# Altium PCB Ver1.0-2280_2023-12-28.pcbdoc
Units mm, origin at the board's own origin, x right, y up, seen from the top; angles counter-clockwise.
Board outline 58.17 x 115.32 mm, 2 copper layers (Top Layer, Bottom Layer); 30 components, 47 nets, 402 pads, 81 vias.
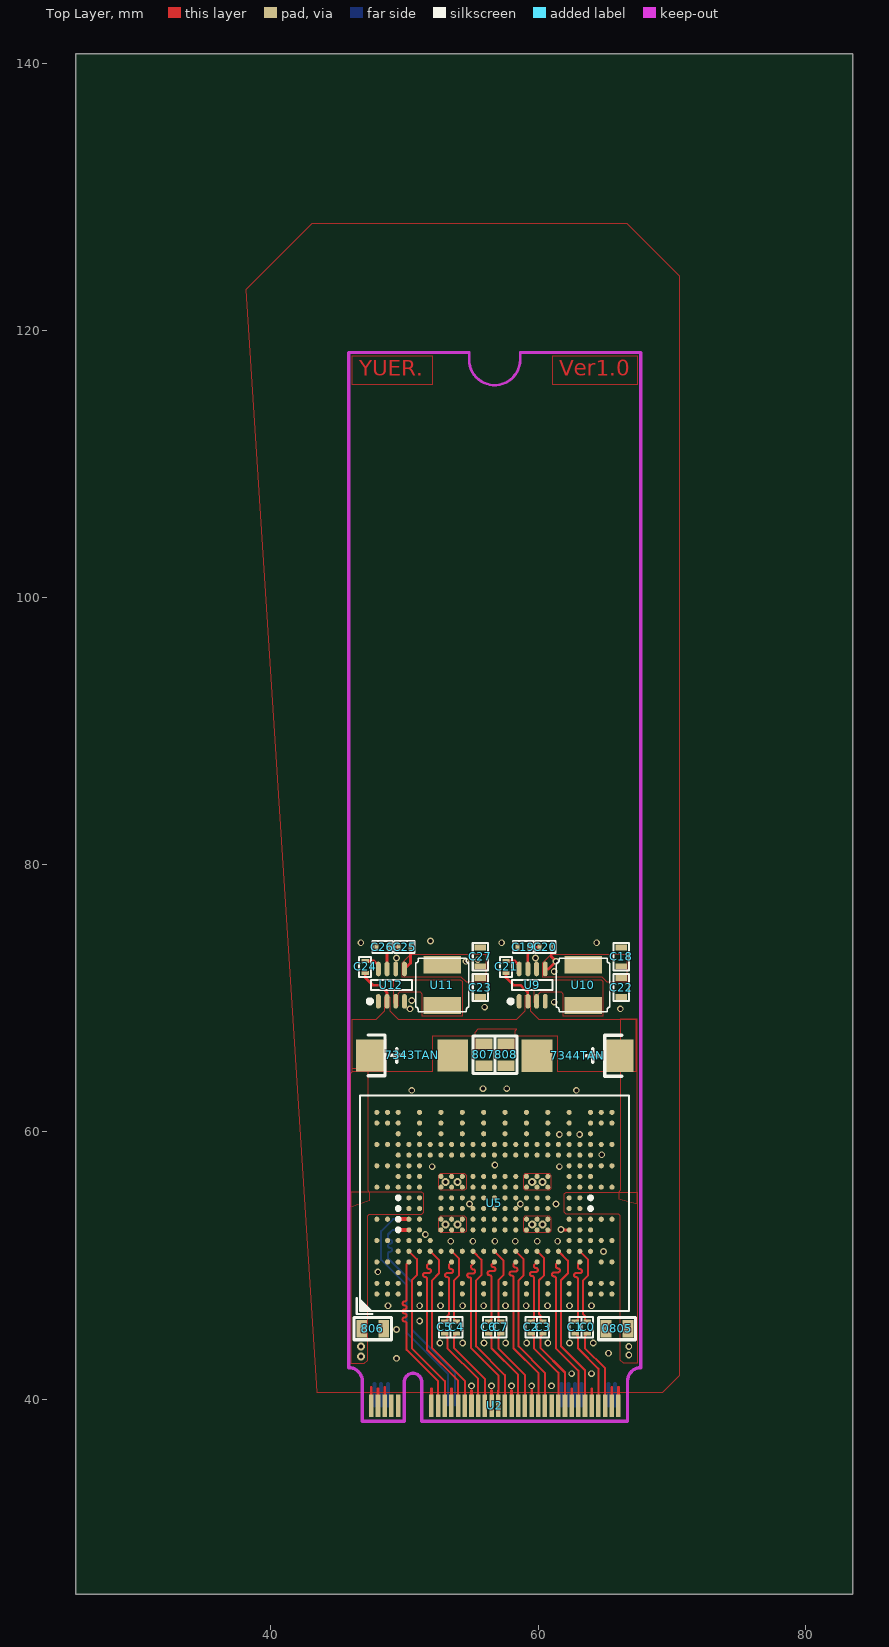
[diagram p0: Top Layer view]
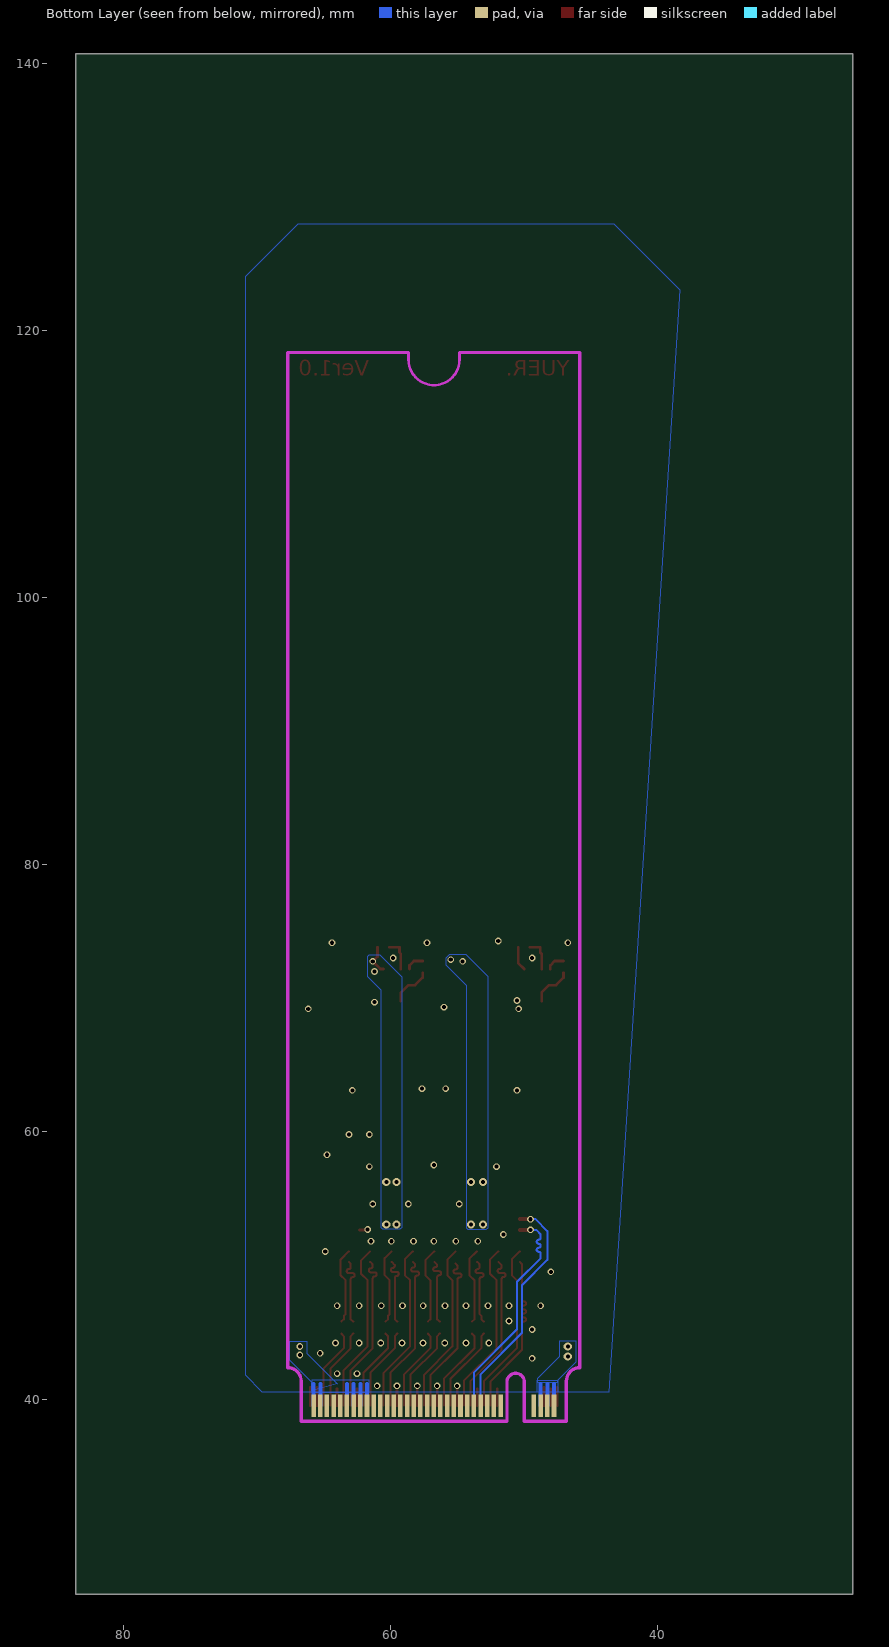
[diagram p1: Bottom Layer view, seen from below]

## Layer stack, top to bottom
Top Layer: signal copper (thickness not stored)
Dielectric: dielectric 0.32, FR-4, Dk 4.8
Bottom Layer: signal copper (thickness not stored)

## Board outline
83.566,25.4 25.4,25.4 25.4,140.716 83.566,140.716

## Components (designator, comment, footprint, x,y, rotation, side; value= is the part's Value field where it differs from the comment)
0805 "_" ?#1 67.183,46.482 r0 top
806 "_" ?#1 48.895,46.482 r0 top
807 "_" ?#1 54.737,67.056 r90 top
808 "_" ?#1 56.388,67.056 r90 top
7343TAN "_" ?#2 48.768,64.516 r180 top
7344TAN "_" ?#2 64.77,66.929 r0 top
C0 "0402" ?#3 64.897,44.831 r270 top
C1 "0402" ?#3 64.008,44.831 r270 top
C2 "0402" ?#3 60.706,44.831 r270 top
C3 "0402" ?#3 61.595,44.831 r270 top
C4 "0402" ?#3 55.118,44.831 r270 top
C5 "0402" ?#3 54.229,44.831 r270 top
C6 "0402" ?#3 57.531,44.831 r270 top
C7 "0402" ?#3 58.42,44.831 r270 top
C18 "0603" ?#4 67.437,71.628 r270 top
C19 "0402" ?#3 59.436,75.057 r0 top
C20 "0402" ?#3 61.087,75.057 r0 top
C21 "0402" ?#3 56.388,72.898 r90 top
C22 "0603" ?#4 67.437,69.342 r270 top
C23 "0603" ?#4 56.896,69.342 r270 top
C24 "0402" ?#3 45.847,72.898 r90 top
C25 "0402" ?#3 50.546,75.057 r0 top
C26 "0402" ?#3 48.895,75.057 r0 top
C27 "0603" ?#4 56.896,71.628 r270 top
U2 "M.2 M KEY FINGERS" "M.2 M KEY FINGERS" 56.769,38.354 r270 top
U5 "1620 BGA291SSD" "1620 BGA291SSD" 56.642,54.61 r0 top
U9 "MP2143" TSOT-23-8_L2.9-W1.6-P0.65-LS2.8-BR 59.563,70.993 r270 top
U10 "NR4018" NR4018 63.373,70.993 r0 top
U11 "NR4018" NR4018 52.832,70.993 r0 top
U12 "MP2143" TSOT-23-8_L2.9-W1.6-P0.65-LS2.8-BR 49.022,70.993 r270 top

## Footprints (in the part's own frame and the unit in brackets; to place one, negate y for a bottom-side part, rotate by r counter-clockwise, add the part's x,y. Pads: shape width x height; smd on the part's side, far side on the other; paste and mask are expansions set on the pad)
"1620 BGA291SSD" [mil]
  round 15.06 smd paste-3937 mask+2: A1(-342.92,-265.44) A2(-342.92,-233.94) A4(-342.92,-170.95) A6(-342.92,-107.96) A8(-342.92,-44.97) A11(-342.92,49.52) A13(-342.92,112.51) A15(-342.92,175.51) A17(-342.92,238.5) A18(-342.92,269.99) AA1(287,-265.44) AA2(287,-233.94) AA5(287,-139.45) AA6(287,-107.96) AA7(287,-76.46) AA8(287,-44.97) AA11(287,49.52) AA12(287,81.02) AA13(287,112.51) AA14(287,144.01) AA15(287,175.51) AA16(287,207) AA17(287,238.5) AA18(287,269.99) AB1(318.5,-265.44) AB2(318.5,-233.94) AB4(318.5,-170.95) AB6(318.5,-107.96) AB8(318.5,-44.97) AB11(318.5,49.52) AB13(318.5,112.51) AB15(318.5,175.51) AB17(318.5,238.5) AB18(318.5,269.99) AC1(350,-265.44) AC2(350,-233.94) AC4(350,-170.95) AC6(350,-107.96) AC8(350,-44.97) AC11(350,49.52) AC13(350,112.51) AC15(350,175.51) AC17(350,238.5) AC18(350,269.99) B1(-311.42,-265.44) B2(-311.42,-233.94) B4(-311.42,-170.95) B6(-311.42,-107.96) B8(-311.42,-44.97) B11(-311.42,49.52) B13(-311.42,112.51) B15(-311.42,175.51) B17(-311.42,238.5) B18(-311.42,269.99) C1(-279.92,-265.44) C2(-279.92,-233.94) C3(-279.92,-202.44) C4(-279.92,-170.95) C5(-279.92,-139.45) C6(-279.92,-107.96) C11(-279.92,49.52) C12(-279.92,81.02) C13(-279.92,112.51) C14(-279.92,144.01) C15(-279.92,175.51) C16(-279.92,207) C17(-279.92,238.5) C18(-279.92,269.99) D4(-248.43,-170.95) D5(-248.43,-139.45) D6(-248.43,-107.96) D7(-248.43,-76.46) D8(-248.43,-44.97) D9(-248.43,-13.47) D10(-248.43,18.03) D11(-248.43,49.52) D12(-248.43,81.02) D13(-248.43,112.51) D14(-248.43,144.01) D15(-248.43,175.51) E1(-216.93,-265.44) E2(-216.93,-233.94) E5(-216.93,-139.45) E6(-216.93,-107.96) E7(-216.93,-76.46) E8(-216.93,-44.97) E9(-216.93,-13.47) E10(-216.93,18.03) E11(-216.93,49.52) E12(-216.93,81.02) E13(-216.93,112.51) E14(-216.93,144.01) E15(-216.93,175.51) E16(-216.93,207) E17(-216.93,238.5) E18(-216.93,269.99) F4(-185.44,-170.95) F5(-185.44,-139.45) F6(-185.44,-107.96) F14(-185.44,144.01) F15(-185.44,175.51) G1(-153.94,-265.44) G2(-153.94,-233.94) G5(-153.94,-139.45) G7(-153.94,-76.46) G8(-153.94,-44.97) G9(-153.94,-13.47) G10(-153.94,18.03) G11(-153.94,49.52) G12(-153.94,81.02) G14(-153.94,144.01) G15(-153.94,175.51) G16(-153.94,207) G17(-153.94,238.5) G18(-153.94,269.99) H4(-122.44,-170.95) H5(-122.44,-139.45) H7(-122.44,-76.46) H8(-122.44,-44.97) H9(-122.44,-13.47) H10(-122.44,18.03) H11(-122.44,49.52) H12(-122.44,81.02) H14(-122.44,144.01) H15(-122.44,175.51) J1(-90.95,-265.44) J2(-90.95,-233.94) J5(-90.95,-139.45) J7(-90.95,-76.46) J8(-90.95,-44.97) J9(-90.95,-13.47) J10(-90.95,18.03) J11(-90.95,49.52) J12(-90.95,81.02) J14(-90.95,144.01) J15(-90.95,175.51) J16(-90.95,207) J17(-90.95,238.5) J18(-90.95,269.99) K4(-59.45,-170.95) K5(-59.45,-139.45) K7(-59.45,-76.46) K8(-59.45,-44.97) K9(-59.45,-13.47) K10(-59.45,18.03) K11(-59.45,49.52) K12(-59.45,81.02) K14(-59.45,144.01) K15(-59.45,175.51) L1(-27.96,-265.44) L2(-27.96,-233.94) L5(-27.96,-139.45) L7(-27.96,-76.46) L8(-27.96,-44.97) L9(-27.96,-13.47) L10(-27.96,18.03) L11(-27.96,49.52) L12(-27.96,81.02) L14(-27.96,144.01) L15(-27.96,175.51) L16(-27.96,207) L17(-27.96,238.5) L18(-27.96,269.99) M4(3.54,-170.95) M5(3.54,-139.45) M7(3.54,-76.46) M8(3.54,-44.97) M9(3.54,-13.47) M10(3.54,18.03) M11(3.54,49.52) M12(3.54,81.02) M14(3.54,144.01) M15(3.54,175.51) N1(35.04,-265.44) N2(35.04,-233.94) N5(35.04,-139.45) N7(35.04,-76.46) N8(35.04,-44.97) N9(35.04,-13.47) N10(35.04,18.03) N11(35.04,49.52) N12(35.04,81.02) N14(35.04,144.01) N15(35.04,175.51) N16(35.04,207) N17(35.04,238.5) N18(35.04,269.99) P4(66.53,-170.95) P5(66.53,-139.45) P7(66.53,-76.46) P8(66.53,-44.97) P9(66.53,-13.47) P10(66.53,18.03) P11(66.53,49.52) P12(66.53,81.02) P14(66.53,144.01) P15(66.53,175.51) R1(98.03,-265.44) R2(98.03,-233.94) R5(98.03,-139.45) R7(98.03,-76.46) R8(98.03,-44.97) R9(98.03,-13.47) R10(98.03,18.03) R11(98.03,49.52) R12(98.03,81.02) R14(98.03,144.01) R15(98.03,175.51) R16(98.03,207) R17(98.03,238.5) R18(98.03,269.99) T4(129.52,-170.95) T5(129.52,-139.45) T7(129.52,-76.46) T8(129.52,-44.97) T9(129.52,-13.47) T10(129.52,18.03) T11(129.52,49.52) T12(129.52,81.02) T14(129.52,144.01) T15(129.52,175.51) U1(161.02,-265.44) U2(161.02,-233.94) U5(161.02,-139.45) U7(161.02,-76.46) U8(161.02,-44.97) U9(161.02,-13.47) U10(161.02,18.03) U11(161.02,49.52) U12(161.02,81.02) U14(161.02,144.01) U15(161.02,175.51) U16(161.02,207) U17(161.02,238.5) U18(161.02,269.99) V4(192.52,-170.95) V5(192.52,-139.45) V14(192.52,144.01) V15(192.52,175.51) W1(224.01,-265.44) W2(224.01,-233.94) W5(224.01,-139.45) W6(224.01,-107.96) W7(224.01,-76.46) W8(224.01,-44.97) W9(224.01,-13.47) W10(224.01,18.03) W11(224.01,49.52) W12(224.01,81.02) W13(224.01,112.51) W14(224.01,144.01) W15(224.01,175.51) W16(224.01,207) W17(224.01,238.5) W18(224.01,269.99) Y4(255.51,-170.95) Y5(255.51,-139.45) Y6(255.51,-107.96) Y7(255.51,-76.46) Y8(255.51,-44.97) Y9(255.51,-13.47) Y10(255.51,18.03) Y11(255.51,49.52) Y12(255.51,81.02) Y13(255.51,112.51) Y14(255.51,144.01) Y15(255.51,175.51)
  silkscreen extent -402,-337 400,320
"M.2 M KEY FINGERS" [mm]
  rect 1.7x0.34 smd paste+0 mask+0.102: 1(-1.15,9.25) 3(-1.15,8.75) 5(-1.15,8.249) 7(-1.15,7.749) 9(-1.15,7.249) 11(-1.15,6.749) 13(-1.15,6.249) 15(-1.15,5.749) 17(-1.15,5.249) 19(-1.15,4.749) 21(-1.15,4.249) 23(-1.15,3.749) 25(-1.15,3.249) 27(-1.15,2.749) 29(-1.15,2.249) 31(-1.15,1.749) 33(-1.15,1.249) 35(-1.15,0.749) 37(-1.15,0.249) 39(-1.15,-0.251) 41(-1.15,-0.751) 43(-1.15,-1.251) 45(-1.15,-1.751) 47(-1.15,-2.251) 49(-1.15,-2.751) 51(-1.15,-3.251) 53(-1.15,-3.751) 55(-1.15,-4.251) 57(-1.15,-4.751) 67(-1.15,-7.251) 69(-1.15,-7.751) 71(-1.15,-8.251) 73(-1.15,-8.751) 75(-1.15,-9.251)
  rect 1.7x0.34 smd far side paste+0 mask+0.102: 2(-1.15,9) 4(-1.15,8.501) 6(-1.15,8.001) 8(-1.15,7.501) 10(-1.15,7.001) 12(-1.15,6.501) 14(-1.15,6.001) 16(-1.15,5.501) 18(-1.15,5.001) 20(-1.151,4.499) 22(-1.15,4.001) 24(-1.15,3.501) 26(-1.15,3.001) 28(-1.15,2.501) 30(-1.15,2.001) 32(-1.15,1.501) 34(-1.15,1.001) 36(-1.15,0.501) 38(-1.15,0.001) 40(-1.15,-0.499) 42(-1.151,-0.998) 44(-1.15,-1.499) 46(-1.15,-1.999) 48(-1.15,-2.499) 50(-1.15,-2.999) 52(-1.15,-3.499) 54(-1.15,-3.999) 56(-1.15,-4.499) 58(-1.15,-4.999) 68(-1.15,-7.499) 70(-1.15,-7.999) 72(-1.15,-8.499) 74(-1.15,-8.999)
  Keep-Out Layer lines w0.254: -3,-9.93 0,-9.93 0,-6.78 -2.9,-6.78 ; -2.9,-5.48 0,-5.48 0,9.93 -3,9.93
  Keep-Out Layer lines w0.254: -4,-10.93 cw(c-3,-10.93) -3,-9.93 ; -2.9,-6.78 cw(c-2.931,-6.13) -2.9,-5.48 ; -3,9.93 cw(c-3,10.93) -4,10.93
NR4018 [mm]
  rect 2.8x1.3 smd paste+0 mask+0.102: 1(0,1.527) 2(0,-1.527)
  silkscreen extent -2,-2 2,2
TSOT-23-8_L2.9-W1.6-P0.65-LS2.8-BR [mm]
  oval 1.1x0.364 smd paste+0 mask+0.051: 1(1.211,-0.975) 2(1.211,-0.325) 3(1.211,0.325) 4(1.211,0.975) 5(-1.211,0.975) 6(-1.211,0.325) 7(-1.211,-0.325) 8(-1.211,-0.975)
  silkscreen extent -0.37,-1.76 1.36,1.53
?#1 [mm]
  rect 0.8x1.3 smd paste+0 mask+0.05: 1(-0.445,-1.217) 2(-2.095,-1.217)
  silkscreen extent -2.67,-2.04 0.13,-0.39
?#2 [mm]
  rect 2.3x2.4 smd paste+0 mask+0.051: 1(-4.851,-1.221) 1(1.245,-1.221)
  silkscreen extent -1.17,-2.74 1.5,0.3
?#3 [mm]
  rect 0.3x0.55 smd paste+0 mask+0.051: 1(-0.985,-1.217) 1(-0.096,-1.217)
  silkscreen extent -1.31,-1.66 0.22,-0.77
?#4 [mm]
  rect 0.45x0.85 smd paste+0 mask+0.051: 2(-2.173,-1.216) 2(-0.776,-1.216)
  silkscreen extent -2.5,-1.78 -0.47,-0.64

## Via types
v1: diameter 0.5, hole 0.305, Top Layer to Bottom Layer, tented both sides, 71 vias
v2: diameter 0.61, hole 0.305, Top Layer to Bottom Layer, tented both sides, 10 vias

## Nets (pads, with @x,y where several pads share a name; then routed paths per layer and width w, separated by ;. In a path a pad name is that pad's centre, name@x,y a point inside that pad or via, vN(x,y) a via of type N, cw(c..) or ccw(c..) an arc to the next point about the centre after c; other vN are vias at no path point)
1.2V: C23.2@55.68,71.515 C25.1@50.45,73.84 C27.2@55.68,72.404 U5.G7 U5.G8 U5.G11 U5.G12 U5.H7 U5.H8 U5.H11 U5.H12 U5.J7 U5.J8 U5.J11 U5.J12 U11.1 U12.5 | length 1.8
  Top Layer w0.2: U12.5 50.449,72.644 C25.1@50.449,73.84
  other v1: 54.61,72.771 55.499,72.898
  other v2: 53.086,53.086 53.975,53.086 53.086,56.261 53.975,56.261
1.8V: C18.2@66.221,72.404 C20.1@60.991,73.84 C22.2@66.221,71.515 U5.R7 U5.R8 U5.R11 U5.R12 U5.T7 U5.T8 U5.T11 U5.T12 U5.U7 U5.U8 U5.U11 U5.U12 U9.5 U10.1 | length 2.3
  Top Layer w0.2: U9.5 60.775,72.205 v1(61.341,72.771) 60.991,73.121 C20.1@60.991,73.84
  other v1: 61.214,72.009
  other v2: 59.563,53.086 60.325,53.086 59.563,56.261 60.325,56.261
3.3V: 0805.1 806.2 807.1 808.1 7343TAN.1@47.523,65.737 7344TAN.1@66.015,65.708 C21.1@57.605,71.913 C24.1@47.064,71.913 U2.2 U2.4 U2.12 U2.14 U2.16 U2.18 U2.70 U2.72 U2.74 U5.D9 U5.D10 U5.E9 U5.E10 U5.W9 U5.W10 U5.Y9 U5.Y10 U9.2 U12.2 | length 21
  Top Layer w0.2: C24.1@47.064,71.913 47.064,71.554 47.625,70.993 48.133,70.993 48.697,70.429 U12.2 ; C21.1@57.605,71.913 57.605,71.554 58.166,70.993 58.674,70.993 59.238,70.429 U9.2
  Bottom Layer w0.3: U2.74 47.77,41.148 ; 48.26,41.148 U2.72 ; U2.70 48.77,41.148 ; U2.18 61.77,41.148 ; U2.16 62.271,41.148 ; U2.14 62.77,41.148 ; U2.12 63.27,41.148 ; U2.4 65.27,41.148 ; U2.2 65.769,41.148
  other v1: 66.802,43.307 66.802,43.942
  other v2: 46.736,43.18 46.736,43.942
EN: C21.1@57.605,72.802 C24.1@47.064,72.802 U9.8 U12.8 | length 2.8
  Top Layer w0.2: C24.1@47.064,72.802 47.721,72.802 48.047,72.476 U12.8 ; C21.1@57.605,72.802 58.262,72.802 58.588,72.476 U9.8
FB: C19.1@59.34,73.84 C20.1@60.102,73.84 C25.1@49.561,73.84 C26.1@48.799,73.84 U9.7 U12.7 | length 4.9
  Top Layer w0.2: U12.7 48.697,73.335 48.798,73.436 C26.1@48.798,73.84 ; C26.1@48.799,73.84 C25.1@49.561,73.84 ; U9.7 59.238,73.335 59.339,73.436 C19.1@59.339,73.84 ; C19.1@59.34,73.84 C20.1@60.102,73.84
GND: 0805.2 806.1 807.2 808.2 7343TAN.1@53.619,65.737 7344TAN.1@59.919,65.708 C18.2@66.221,73.801 C19.1@58.451,73.84 C22.2@66.221,70.118 C23.2@55.68,70.118 C26.1@47.91,73.84 C27.2@55.68,73.801 U2.1 U2.3 U2.9 U2.15 U2.21 U2.27 U2.33 U2.39 U2.45 U2.51 U2.57 U2.71 U2.73 U2.75 U5.AA1 U5.AA2 U5.AA5 U5.AA14 U5.AA15 U5.C1 U5.C2 U5.C3 U5.C4 U5.C5 U5.C15 U5.D6 U5.D11 U5.E1 U5.E2 U5.E5 U5.E6 U5.E7 U5.E11 U5.E14 U5.E15 U5.F6 U5.G1 U5.G2 U5.G5 U5.G9 U5.G10 U5.G14 U5.G15 U5.H9 U5.H10 U5.J1 U5.J2 U5.J5 U5.J9 U5.J10 U5.J14 U5.J15 U5.K7 U5.K8 U5.K9 U5.K10 U5.K11 U5.K12 U5.L1 U5.L2 U5.L5 U5.L14 U5.L15 U5.M9 U5.M10 U5.N1 U5.N2 U5.N5 U5.N14 U5.N15 U5.P7 U5.P8 U5.P9 U5.P10 U5.P11 U5.P12 U5.R1 U5.R2 U5.R5 U5.R9 U5.R10 U5.R14 U5.R15 U5.T9 U5.T10 U5.U1 U5.U2 U5.U5 U5.U9 U5.U10 U5.U14 U5.U15 U5.W1 U5.W2 U5.W5 U5.W6 U5.W11 U5.W14 U5.W15 U5.Y6 U5.Y11 U5.Y13 U9.4 U9.6 U12.4 U12.6 | length 16.4
  Top Layer w0.2: U2.75 47.518,40.894 ; U2.73 48.018,40.767 ; U2.71 48.518,40.894 ; U2.57 52.018,40.767 ; U2.51 53.518,40.767 ; U2.45 55.018,40.64 ; U2.39 56.518,40.64 ; U2.33 58.018,40.64 ; U2.27 59.518,40.64 ; U2.15 62.518,40.767 ; U2.9 64.018,40.767 ; U2.3 65.519,40.894 ; U2.1 66.019,40.894
  other v1: 55.019,40.992 56.515,40.992 58.009,40.992 59.519,40.992 61.009,40.992 62.519,41.91 64.008,41.91 49.403,43.053 65.278,43.434 52.649,44.196 54.356,44.196 55.949,44.196 57.579,44.196 59.149,44.196 60.739,44.196 62.357,44.196 64.135,44.196 49.403,45.212 51.139,45.847 48.768,46.99 51.139,46.99 52.705,46.99 54.356,46.99 55.929,46.99 57.569,46.99 59.109,46.99 60.706,46.99 62.357,46.99 64.008,46.99 48.006,49.53 64.897,51.054 53.467,51.816 55.118,51.816 56.769,51.816 58.293,51.816 59.944,51.816 61.468,51.816 51.562,52.324 54.864,54.61 58.674,54.61 61.341,54.61 52.07,57.404 61.595,57.404 56.769,57.531 64.77,58.293 61.595,59.817 63.119,59.817 50.546,63.119 62.865,63.119 55.88,63.246 57.658,63.246 50.419,69.215 66.167,69.215 56.007,69.342 61.214,69.723 50.546,69.85 49.403,73.025 59.817,73.025 46.736,74.168 57.277,74.168 64.389,74.168 51.943,74.295
LED:  | length 0.6
  Top Layer w0.2: v1(61.722,52.705) 61.76,52.667 62.332,52.667
NC: 
POWERGOOD: U9.1 U12.1
S$1271: 
S$1273: 
S$1347: 
S$1349: 
S$1351: 
S$17489: 
S$17493: 
S$81905: 
S$82656: U2.13 U5.V4 | length 12.3
  Top Layer w0.15: U5.V4 61.341,50.079 61.341,49.94 ccw(c61.491,49.94) 61.491,49.79 cw(c61.489,49.64) 61.491,49.49 61.341,49.49 61.191,49.49 ccw(c61.193,49.34) 61.191,49.19 cw(c61.191,49.04) 61.341,49.04 61.341,43.815 63.017,42.139 U2.13
S$82660: U2.11 U5.V5 | length 12.8
  Top Layer w0.15: U5.V5 62.23,50.371 62.23,49.403 61.722,48.895 61.722,43.942 63.518,42.146 U2.11
S$89547: C1.1 U2.7 U5.Y4 | length 11.6
  Top Layer w0.15: C1.1@62.791,45.816 62.834,45.816 62.992,45.974 62.992,46.228 62.992,48.982 ccw(c62.842,48.982) 62.842,49.132 cw(c62.844,49.282) 62.842,49.432 62.992,49.432 63.142,49.432 ccw(c63.14,49.582) 63.142,49.732 cw(c63.142,49.882) 62.992,49.882 62.992,50.128 U5.Y4@63.132,50.268 ; C1.1@62.791,44.928 62.992,44.704 62.992,44.45 62.992,43.815 64.519,42.288 U2.7
S$89551: C0.1 U2.5 U5.Y5 | length 11.9
  Top Layer w0.15: U5.Y5 63.754,50.447 63.754,49.276 63.373,48.895 63.373,46.355 63.5,46.228 63.5,45.974 C0.1@63.68,45.817 ; C0.1@63.68,44.928 63.68,44.884 63.5,44.704 63.5,44.45 63.5,43.815 65.019,42.296 U2.5
S$89662: C2.1@59.489,44.927 | length 6.3
  Top Layer w0.15: C2.1@59.489,44.928 59.69,44.704 59.69,44.45 59.69,43.815 61.519,41.986 61.519,40.589 ; 61.518,39.504 61.518,40.64
S$89666: C3.1@60.378,44.927 | length 6.3
  Top Layer w0.15: C3.1@60.378,44.928 60.378,44.884 60.198,44.704 60.198,44.45 60.198,43.815 62.019,41.994 62.019,40.546 ; 62.018,39.504 62.018,40.64
S$89676: C2.1@59.489,45.816 U5.T4 | length 5.5
  Top Layer w0.15: C2.1@59.489,45.816 59.532,45.816 59.69,45.974 59.69,46.101 59.69,49.071 ccw(c59.54,49.071) 59.54,49.221 cw(c59.542,49.371) 59.54,49.521 59.69,49.521 59.84,49.521 ccw(c59.838,49.671) 59.84,49.821 cw(c59.84,49.971) 59.69,49.971 59.69,50.026 U5.T4@59.932,50.268
S$89680: C3.1@60.378,45.816 U5.T5 | length 5.8
  Top Layer w0.15: U5.T5 60.452,50.549 60.452,49.276 60.071,48.895 60.071,46.355 60.198,46.228 60.198,46.101 60.198,45.974 C3.1@60.378,45.817
S$89714: U5.P5 | length 12.8
  Top Layer w0.15: U5.P5 58.928,50.472 58.928,49.276 58.547,48.895 58.547,43.942 60.518,41.971 60.518,40.64 60.518,39.504
S$89718: U5.P4 | length 12.4
  Top Layer w0.15: U5.P4@58.332,50.268 58.166,50.102 58.166,49.996 ccw(c58.316,49.996) 58.316,49.846 cw(c58.314,49.696) 58.316,49.546 58.166,49.546 58.016,49.546 ccw(c58.018,49.396) 58.016,49.246 cw(c58.016,49.096) 58.166,49.096 58.166,43.815 60.018,41.963 60.018,40.64 60.018,39.504
S$89746: C7.1@57.203,44.927 | length 6.4
  Top Layer w0.15: C7.1@57.203,44.928 57.203,44.884 57.023,44.704 57.023,44.577 57.023,43.815 59.018,41.82 59.018,40.554 ; 59.018,39.504 59.018,40.64
S$89750: C6.1@56.314,44.927 | length 6.3
  Top Layer w0.15: C6.1@56.314,44.928 56.515,44.704 56.515,44.577 56.515,43.815 58.519,41.811 58.519,40.64 ; 58.518,39.504 58.518,40.64
S$89763: C6.1@56.314,45.816 U5.M4 | length 5.5
  Top Layer w0.15: C6.1@56.314,45.816 56.357,45.816 56.515,45.974 56.515,46.101 56.515,49.125 ccw(c56.365,49.125) 56.365,49.275 cw(c56.367,49.425) 56.365,49.575 56.515,49.575 56.665,49.575 ccw(c56.663,49.725) 56.665,49.875 cw(c56.665,50.025) 56.515,50.025 56.515,50.051 U5.M4@56.732,50.268
S$89767: C7.1@57.203,45.816 U5.M5 | length 5.8
  Top Layer w0.15: U5.M5@56.732,51.068 57.404,50.396 57.404,49.276 57.023,48.895 57.023,46.101 57.023,45.974 C7.1@57.203,45.817
S$89801: U5.K5 | length 12.9
  Top Layer w0.15: U5.K5@55.132,51.068 55.753,50.447 55.753,49.276 55.372,48.895 55.372,43.942 57.518,41.796 57.518,40.64 57.518,39.504
S$89805: U5.K4 | length 12.5
  Top Layer w0.15: U5.K4@55.137,50.141 54.996,50 54.996,49.863 ccw(c55.146,49.863) 55.146,49.713 cw(c55.144,49.563) 55.146,49.413 54.996,49.413 54.846,49.413 ccw(c54.848,49.263) 54.846,49.113 cw(c54.846,48.963) 54.996,48.963 54.996,43.81 57.023,41.783 57.023,40.513 ; 57.018,39.504 57.018,40.64
S$89833: C4.1@53.901,44.927 | length 6.4
  Top Layer w0.15: C4.1@53.901,44.928 53.901,44.884 53.721,44.704 53.721,44.45 53.721,43.815 56.018,41.518 56.018,40.64 56.018,39.504
S$89837: C5.1@53.012,44.927 | length 6.5
  Top Layer w0.15: C5.1@53.012,44.928 53.213,44.704 53.213,44.45 53.213,43.815 55.519,41.509 55.519,40.64 ; 55.518,39.504 55.518,40.64
S$89847: C5.1@53.012,45.816 U5.H4 | length 5.5
  Top Layer w0.15: C5.1@53.012,45.816 53.055,45.816 53.213,45.974 53.213,46.101 53.213,46.228 53.34,46.355 53.34,48.981 ccw(c53.19,48.981) 53.19,49.131 cw(c53.192,49.281) 53.19,49.431 53.34,49.431 53.49,49.431 ccw(c53.488,49.581) 53.49,49.731 cw(c53.49,49.881) 53.34,49.881 53.34,50.076 U5.H4@53.532,50.268
S$89851: C4.1@53.901,45.816 U5.H5 | length 5.7
  Top Layer w0.15: U5.H5 54.102,50.498 54.102,49.276 53.721,48.895 53.721,46.101 53.721,45.974 C4.1@53.901,45.817
S$89888: U5.F5 | length 13.1
  Top Layer w0.15: U5.F5 52.578,50.422 52.578,49.403 52.07,48.895 52.07,43.815 54.519,41.366 54.519,40.64 54.518,39.504
S$89898: U5.F4 | length 12.6
  Top Layer w0.15: U5.F4@51.932,50.268 51.689,50.025 51.689,49.897 ccw(c51.839,49.897) 51.839,49.747 cw(c51.837,49.597) 51.839,49.447 51.689,49.447 51.539,49.447 ccw(c51.541,49.297) 51.539,49.147 cw(c51.539,48.997) 51.689,48.997 51.689,43.688 54.018,41.359 54.018,40.64 54.018,39.504
S$89926: U5.D5 | length 13
  Top Layer w0.15: U5.D5 50.927,50.472 50.927,49.276 50.546,48.895 50.546,43.815 53.017,41.344 53.017,40.64 ; 53.018,39.504 53.018,40.64
S$89930: U5.D4 | length 12.8
  Top Layer w0.15: U5.D4@50.332,50.268 50.165,50.101 50.165,47.464 cw(c50.015,47.464) 50.015,47.314 ccw(c50.015,47.164) 50.015,47.014 cw(c50.015,46.864) 50.165,46.864 cw(c50.015,46.864) 50.015,46.714 ccw(c50.015,46.564) 50.015,46.414 cw(c50.015,46.264) 50.165,46.264 cw(c50.015,46.264) 50.015,46.114 ccw(c50.015,45.964) 50.015,45.814 cw(c50.015,45.664) 50.165,45.664 50.165,43.688 52.52,41.333 52.52,40.64 ; 52.518,39.504 52.518,40.64
S$89994: U2.50 U2.52 | length 34.9
  Top Layer w0.3: v1(49.532,52.668) 50.332,52.668 ; v1(49.532,53.468) 50.332,53.468
  Bottom Layer w0.15: v1(49.532,52.668) 49.112,52.668 48.768,52.324 48.768,52.082 ccw(c48.918,52.082) 48.918,51.932 cw(c48.918,51.782) 48.918,51.631 ccw(c48.918,51.481) 48.768,51.481 ccw(c48.918,51.481) 48.918,51.331 cw(c48.918,51.181) 48.918,51.031 ccw(c48.918,50.881) 48.768,50.882 48.768,50.546 50.546,48.768 50.546,48.326 50.546,45.212 53.769,41.989 U2.50 ; v1(49.532,53.468) 49.149,53.467 48.26,52.578 48.26,50.419 50.165,48.514 50.165,48.331 50.165,44.958 53.269,41.854 U2.52
S$115904: 
S$116199: 
S$116216: 
S$116224: 
SW: U9.3 U10.2 U11.2 U12.3
pads on no net: U2.6 U2.8 U2.10 U2.17 U2.19 U2.20 U2.22 U2.23 U2.24 U2.25 U2.26 U2.28 U2.29 U2.30 U2.31 U2.32 U2.34 U2.35 U2.36 U2.37 U2.38 U2.40 U2.41 U2.42 U2.43 U2.44 U2.46 U2.47 U2.48 U2.49 U2.53 U2.54 U2.55 U2.56 U2.58 U2.67 U2.68 U2.69 U5.A1 U5.A2 U5.A4 U5.A6 U5.A8 U5.A11 U5.A13 U5.A15 U5.A17 U5.A18 U5.AA6 U5.AA7 U5.AA8 U5.AA11 U5.AA12 U5.AA13 U5.AA16 U5.AA17 U5.AA18 U5.AB1 U5.AB2 U5.AB4 U5.AB6 U5.AB8 U5.AB11 U5.AB13 U5.AB15 U5.AB17 U5.AB18 U5.AC1 U5.AC2 U5.AC4 U5.AC6 U5.AC8 U5.AC11 U5.AC13 U5.AC15 U5.AC17 U5.AC18 U5.B1 U5.B2 U5.B4 U5.B6 U5.B8 U5.B11 U5.B13 U5.B15 U5.B17 U5.B18 U5.C6 U5.C11 U5.C12 U5.C13 U5.C14 U5.C16 U5.C17 U5.C18 U5.D7 U5.D8 U5.D12 U5.D13 U5.D14 U5.D15 U5.E8 U5.E12 U5.E13 U5.E16 U5.E17 U5.E18 U5.F14 U5.F15 U5.G16 U5.G17 U5.G18 U5.H14 U5.H15 U5.J16 U5.J17 U5.J18 U5.K14 U5.K15 U5.L7 U5.L8 U5.L9 U5.L10 U5.L11 U5.L12 U5.L16 U5.L17 U5.L18 U5.M7 U5.M8 U5.M11 U5.M12 U5.M14 U5.M15 U5.N7 U5.N8 U5.N9 U5.N10 U5.N11 U5.N12 U5.N16 U5.N17 U5.N18 U5.P14 U5.P15 U5.R16 U5.R17 U5.R18 U5.T14 U5.T15 U5.U16 U5.U17 U5.U18 U5.V14 U5.V15 U5.W7 U5.W8 U5.W12 U5.W13 U5.W16 U5.W17 U5.W18 U5.Y7 U5.Y8 U5.Y12 U5.Y14 U5.Y15

## Polygon pours and split planes (outlines as drawn)
3.3V on Bottom Layer (solid): 65.913,40.513 61.595,40.513 61.595,41.402 65.913,41.402
3.3V on Bottom Layer (solid): 47.498,40.513 49.022,40.513 49.022,41.402 47.498,41.402
3.3V on Bottom Layer (solid): 47.371,44.323 47.371,43.18 49.022,41.529 49.022,41.275 47.498,41.275 47.498,41.402 46.101,42.799 46.101,44.323
3.3V on Bottom Layer (solid): 65.913,40.64 65.913,41.275 67.564,42.926 67.564,44.323 66.294,44.323 66.294,43.434 64.008,41.148
1.8V on Bottom Layer (solid): 59.182,52.832 59.309,52.705 60.579,52.705 60.706,52.832 60.706,70.612 61.722,71.628 61.722,73.152 61.595,73.279 60.833,73.279 59.182,71.628
1.2V on Bottom Layer (solid): 54.356,52.832 54.229,52.705 52.832,52.705 52.705,52.832 52.705,71.628 54.356,73.279 55.626,73.279 55.88,73.025 55.88,72.517 54.356,70.993
GND on Bottom Layer (solid): 43.688,40.513 69.596,40.513 70.866,41.783 70.866,124.079 66.929,128.016 43.307,128.016 38.354,123.063
3.3V on Top Layer (solid): 47.244,42.926 47.244,53.721 47.371,53.848 51.308,53.848 51.435,53.975 51.435,55.372 51.308,55.499 45.974,55.499 45.974,42.672 46.99,42.672
3.3V on Top Layer (solid): 66.167,42.926 66.167,53.721 66.04,53.848 62.103,53.848 61.976,53.975 61.976,55.372 62.103,55.499 67.437,55.499 67.437,42.672 66.421,42.672
3.3V on Top Layer (solid): 59.055,70.231 59.436,70.231 59.436,69.088 60.071,68.453 67.31,68.453 67.31,64.516 61.468,64.516 61.468,67.183 52.07,67.183 52.07,64.516 46.101,64.516 46.101,68.453 47.879,68.453 48.514,69.088 48.514,70.104 48.895,70.104 48.895,69.088 49.53,68.453 58.42,68.453 59.055,69.088
3.3V on Top Layer (solid): 55.245,66.167 58.293,66.167 58.293,67.564 58.42,67.691 55.499,67.691 55.245,67.437
1.8V on Top Layer (solid): 60.325,71.628 64.77,71.628 65.151,71.247 66.675,71.247 66.675,73.279 60.96,73.279 60.325,72.644
1.2V on Top Layer (solid): 49.784,71.628 54.229,71.628 54.61,71.247 56.134,71.247 56.134,73.279 50.419,73.279 49.784,72.644
3.3V on Top Layer (solid): 67.437,54.61 67.437,68.453 66.167,68.453 66.167,55.626 66.04,55.499 66.04,54.991
3.3V on Top Layer (solid): 45.974,54.356 45.974,64.389 46.101,64.516 46.101,64.77 46.355,64.77 47.244,64.77 47.244,55.626 47.371,55.499 47.371,54.864
SW on Top Layer (solid): 60.071,69.469 60.071,70.358 60.198,70.485 61.722,70.485 61.849,70.358 61.849,68.707 64.897,68.707 64.897,71.247 64.77,71.374 59.817,71.374 59.69,71.247 59.69,69.723
SW on Top Layer (solid): 49.53,69.469 49.53,70.358 49.657,70.485 51.181,70.485 51.308,70.358 51.308,68.707 54.356,68.707 54.356,71.247 54.229,71.374 49.276,71.374 49.149,71.247 49.149,69.723
1.8V on Top Layer (solid): 59.055,56.896 60.833,56.896 60.96,56.769 60.96,55.753 60.833,55.626 59.055,55.626 58.928,55.753 58.928,56.769
1.8V on Top Layer (solid): 59.055,53.721 60.833,53.721 60.96,53.594 60.96,52.578 60.833,52.451 59.055,52.451 58.928,52.578 58.928,53.594
1.2V on Top Layer (solid): 52.705,56.896 54.483,56.896 54.61,56.769 54.61,55.753 54.483,55.626 52.705,55.626 52.578,55.753 52.578,56.769
1.2V on Top Layer (solid): 52.705,53.721 54.483,53.721 54.61,53.594 54.61,52.578 54.483,52.451 52.705,52.451 52.578,52.578 52.578,53.594
NC on Top Layer (solid): 46.101,118.11 52.07,118.11 52.07,115.951 46.101,115.951
NC on Top Layer (solid): 61.087,118.11 67.437,118.11 67.437,115.951 61.087,115.951
GND on Top Layer (solid): 43.434,40.513 69.342,40.513 70.612,41.783 70.612,124.079 66.675,128.016 43.053,128.016 38.1,123.063

## Keep-outs
Keep-Out Layer:
  lines w0.2 net S$115904: 54.845,117.823 ccw(c56.754,117.823) 58.663,117.823

## Other copper
Top Layer:
  text "YUER." at 46.609,116.205 h2.03
  text "Ver1.0" at 61.595,116.205 h2.03

## Silkscreen, mask and mechanical layers (free items; w line width, h text height)
Top Solder:
  rectangle: 46.609,38.1 67.056,40.513
  region net S$116216: 54.227,118.354 54.227,116.906 55.735,115.398 58.006,115.398 58.784,116.176 58.784,116.475 59.15,116.841 59.15,118.891 58.926,119.116 54.862,119.116 54.608,118.862
  lines w1 net S$116199: 54.227,117.719 ccw(c56.767,117.719) 59.307,117.719
  lines w1 net S$116216: 54.227,117.719 54.227,118.354
  lines w1 net S$116224: 59.307,117.719 59.307,118.354
Bottom Solder:
  rectangle: 46.609,38.1 67.056,40.513